# EAGLE board 10DOFATMEGAALTBOARD (EAGLE 7.5.0)
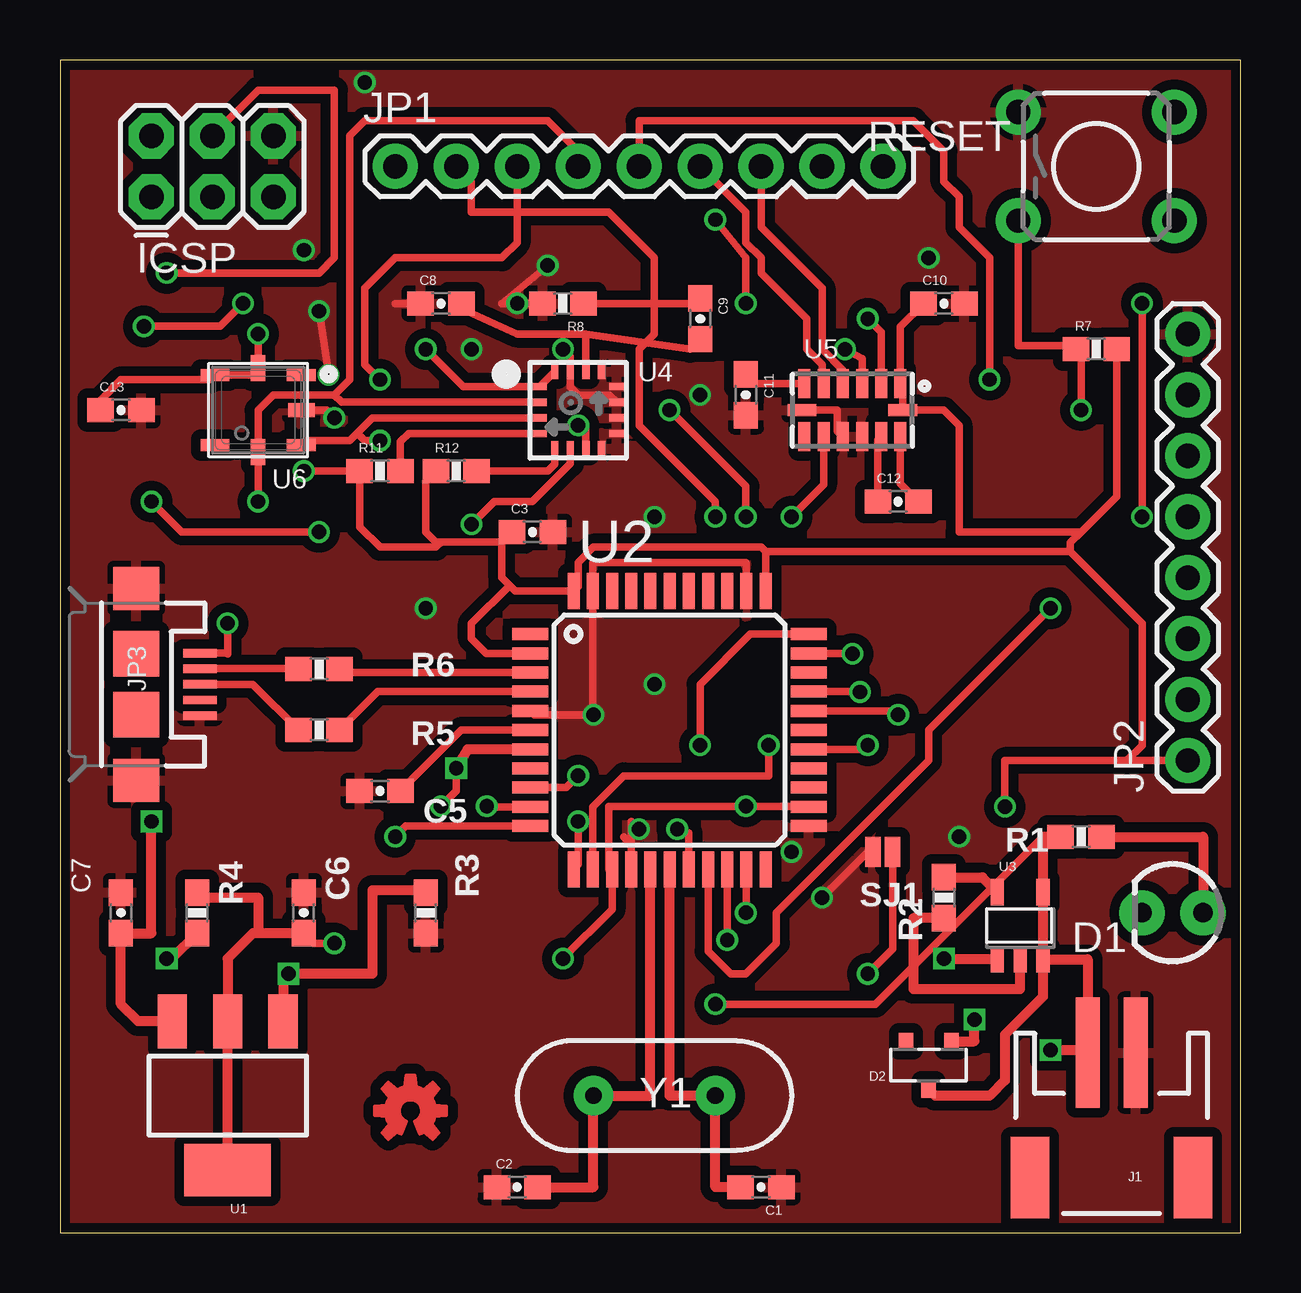
[diagram p0: board, top side]
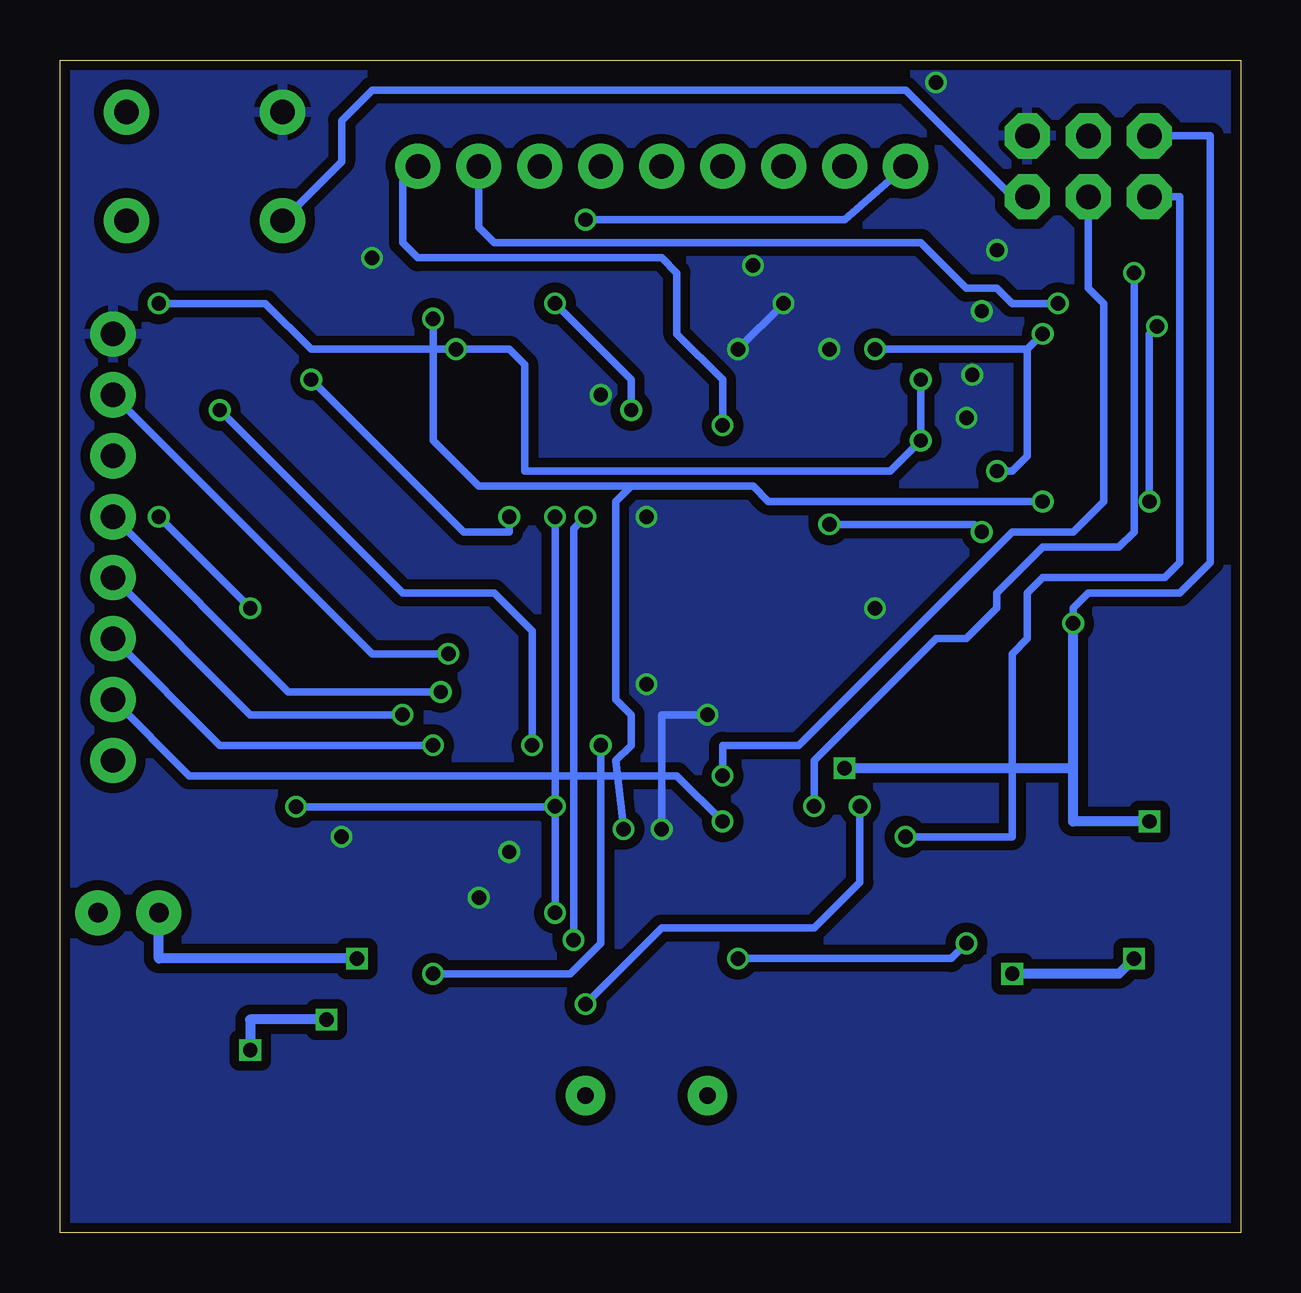
[diagram p1: board, bottom side, seen from below]

Size 49.2 x 48.88 mm. Coordinates in mm from the lower left corner, seen from the top.
Outline: 0,0 49.2,0 49.2,48.88 0,48.88 0,0
Copper layers (1*16): Top 0.035mm / dielectric 1.5mm / Bottom 0.035mm
Design rules "SeeedStudio_2layer_DRU_no_angle_20140221 *": minimum track width 6mil, minimum drill 12mil, track to track 6mil, track to pad 6mil, pad to pad 6mil, via to via 6mil, smd to smd 0mil, copper to edge 10mil, drill to drill 10mil, minimum pad ring 10mil, minimum via ring 6mil, stop-mask expansion 2mil, vias tented up to drill 100mil, thermal gap 10mil

## Footprints (pad centres in the part's own frame; a part is rotated, then mirrored left to right if it is on the bottom)
0603-CAP = smd 1.1 x 1: 1 -0.85,0; 2 0.85,0
LED3MM = drill 0.813 pad 1.88: A -1.27,0; K 1.27,0
SOT23-R = smd 0.6 x 0.7: 1 -0.95,-1; 2 0.95,-1; 3 0,1
2X3 = drill 1.016 pad 1.88 octagon: 1 0,0; 2 0,2.54; 3 2.54,0; 4 2.54,2.54; 5 5.08,0; 6 5.08,2.54
JST-2-SMD = smd 1 x 4.6: 1 -1,-3.7; 2 1,-3.7 | smd 1.6 x 3.4: NC1 -3.4,1.5; NC2 3.4,1.5
1X09 = drill 1.016 pad 1.88: 1 0,0; 2 2.54,0; 3 5.08,0; 4 7.62,0; 5 10.16,0; 6 12.7,0; 7 15.24,0; 8 17.78,0; 9 20.32,0
1X08_ROUND = drill 1.016 pad 1.88: 1 0,0; 2 2.54,0; 3 5.08,0; 4 7.62,0; 5 10.16,0; 6 12.7,0; 7 15.24,0; 8 17.78,0
USB-MICROB = smd 0.35 x 1.4: D+ 0,2.65; D- -0.65,2.65; GND 1.3,2.65; ID 0.65,2.65; VBUS -1.3,2.65 | smd 1.8 x 1.9: MT1 -4,0; MT2 4,0 | smd 1.9 x 1.9: P$1 -1.27,0; P$2 1.27,0
0603-RES = smd 1.1 x 1: 1 -0.85,0; 2 0.85,0
TACTILE-PTH = drill 1.016 pad 1.88: 1 -3.251,2.261; 2 3.251,2.261; 3 -3.251,-2.261; 4 3.251,-2.261
PAD-JUMPER-2-NC_BY_PASTE_NO_SILK = smd 0.635 x 1.27: 1 -0.401,0; 2 0.413,0
SOT223 = smd 1.219 x 2.235: 1 -2.311,-3.099; 2 0,-3.099; 3 2.311,-3.099 | smd 3.6 x 2.2: 4 0,3.099
TQFP44 = smd 1.5 x 0.5: 1 -5.8,4; 2 -5.8,3.2; 3 -5.8,2.4; 4 -5.8,1.6; 5 -5.8,0.8; 6 -5.8,0; 7 -5.8,-0.8; 8 -5.8,-1.6; 9 -5.8,-2.4; 10 -5.8,-3.2; 11 -5.8,-4; 23 5.8,-4; 24 5.8,-3.2; 25 5.8,-2.4; 26 5.8,-1.6; 27 5.8,-0.8; 28 5.8,0; 29 5.8,0.8; 30 5.8,1.6; 31 5.8,2.4; 32 5.8,3.2; 33 5.8,4 | smd 0.5 x 1.5: 12 -4,-5.8; 13 -3.2,-5.8; 14 -2.4,-5.8; 15 -1.6,-5.8; 16 -0.8,-5.8; 17 0,-5.8; 18 0.8,-5.8; 19 1.6,-5.8; 20 2.4,-5.8; 21 3.2,-5.8; 22 4,-5.8; 34 4,5.8; 35 3.2,5.8; 36 2.4,5.8; 37 1.6,5.8; 38 0.8,5.8; 39 0,5.8; 40 -0.8,5.8; 41 -1.6,5.8; 42 -2.4,5.8; 43 -3.2,5.8; 44 -4,5.8
SOT23-5 = smd 0.55 x 1.1: 1 -0.95,-1.3; 2 0,-1.3; 3 0.95,-1.3; 4 0.95,1.5; 5 -0.95,1.5
L3G4200D_LGA16L = smd 0.6 x 0.3: P$1 -1.6,0.975; P$2 -1.6,0.325; P$3 -1.6,-0.325; P$4 -1.6,-0.975; P$9 1.6,-0.975; P$10 1.6,-0.325; P$11 1.6,0.325; P$12 1.6,0.975 | smd 0.3 x 0.6: P$5 -0.975,-1.6; P$6 -0.325,-1.6; P$7 0.325,-1.6; P$8 0.975,-1.6; P$13 0.975,1.6; P$14 0.325,1.6; P$15 -0.325,1.6; P$16 -0.975,1.6
LGA14 = smd 0.5 x 1.2: 1 2,1.1; 2 1.2,1.1; 3 0.4,1.1; 4 -0.4,1.1; 5 -1.2,1.1; 6 -2,1.1; 8 -2,-1.1; 9 -1.2,-1.1; 10 -0.4,-1.1; 11 0.4,-1.1; 12 1.2,-1.1; 13 2,-1.1 | smd 1.2 x 0.5: 7 -2.1,0; 14 2.1,0
BMP180_EXTENDED = smd 1.2 x 0.5: P$1 -1.8,-1.45; P$3 1.8,-1.45; P$4 1.8,1.45; P$6 -1.8,1.45 | smd 0.6 x 1.1: P$2 0,-1.75; P$5 0,1.75 | smd 1.1 x 0.6: P$7 -1.8,0
HC49US = drill 0.7 pad 1.651: 1 -2.54,0; 2 2.54,0

## Placement (x,y rotation side)
C1  [0603-CAP]  29.21,1.91 180 top
C2  [0603-CAP]  19.05,1.91 0 top
C3  0.1uF  [0603-CAP]  19.68,29.21 0 top
C5  [0603-CAP]  13.34,18.41 180 top
C6  22u  [0603-CAP]  10.16,13.34 90 top
C7  10p  [0603-CAP]  2.54,13.34 90 top
C8  10nF  [0603-CAP]  15.88,38.73 0 top
C9  470nF  [0603-CAP]  26.67,38.1 270 top
C10  10uF  [0603-CAP]  36.83,38.73 0 top
C11  4.7uF  [0603-CAP]  28.57,34.92 270 top
C12  .22uF  [0603-CAP]  34.92,30.48 0 top
C13  0.1uF  [0603-CAP]  2.54,34.29 0 top
D1  [LED3MM]  46.35,13.34 180 top
D2  [SOT23-R]  36.2,6.99 180 top
ICSP  AVR_SPI_PRG_6PTH  [2X3]  3.81,43.18 0 top
J1  [JST-2-SMD]  43.81,3.81 180 top
JP1  [1X09]  13.97,44.45 0 top
JP2  [1X08_ROUND]  46.99,19.68 90 top
JP3  USB-MICROB  [USB-MICROB]  3.17,22.86 270 top
LOGO1  OSHW-LOGOS-COPPER  [OSHW-LOGO-S_COPPER]  14.61,5.08 0 top
R1  [0603-RES]  42.55,16.51 0 top
R2  [0603-RES]  36.83,13.97 270 top
R3  330  [0603-RES]  15.24,13.34 90 top
R4  220  [0603-RES]  5.71,13.34 90 top
R5  22  [0603-RES]  10.79,20.95 0 top
R6  22  [0603-RES]  10.79,23.5 0 top
R7  10K  [0603-RES]  43.18,36.83 0 top
R8  10K  [0603-RES]  20.95,38.73 180 top
R11  10K  [0603-RES]  13.34,31.75 0 top
R12  10K  [0603-RES]  16.51,31.75 0 top
RESET  SWITCH-MOMENTARY-2PTH  [TACTILE-PTH]  43.18,44.45 0 top
SJ1  JUMPER-PAD-2-NC_BY_PASTENO-SILK  [PAD-JUMPER-2-NC_BY_PASTE_NO_SILK]  34.29,15.88 180 top
U1  [SOT223]  6.99,5.71 180 top
U2  ATMEGA32U4-AU  [TQFP44]  25.4,20.95 0 top
U3  MCP73831  [SOT23-5]  40.01,12.7 0 top
U4  [L3G4200D_LGA16L]  21.59,34.29 0 top
U5  [LGA14]  33.02,34.29 0 top
U6  [BMP180_EXTENDED]  8.26,34.29 180 top
Y1  [HC49US]  24.77,5.71 0 top

## Library data of the parts
C1-C3 C5-C13 = SparkFun-Capacitors
D1 = SparkFun-LED
D2 U2 = adafruit
ICSP JP1 JP2 = SparkFun-Connectors
J1 = SparkFun-Connectors; BTM_NEG: -; BTM_POS: +; PROD_ID: CONN-11443; TOP_NEG: -; TOP_POS: +
JP3 = SparkFun-Connectors; PROD_ID: CONN-09505
LOGO1 = SparkFun-Aesthetics
R1-R6 = SparkFun-Resistors
R7 R8 R11 R12 = SparkFun-Resistors; PROD_ID: RES-00824
RESET = SparkFun-Electromechanical; PROD_ID: SWCH-08441
SJ1 = SparkFun-Passives
U1 = SparkFun-PowerIC; PROD_ID: VREG-08170
U3 = GeekAmmo
U4 = microbuilderLib
U5 U6 = Adafuit_10DOF
Y1 = SparkFun-FreqCtrl

## Nets
3.3V: C3.1 C6.1 C10.1 C13.1 JP2.1 R4.2 R7.2 R11.1 R12.1 U1.2 U1.4 U2.2 U2.14 U2.24 U2.34 U2.44 U4.P$1 U4.P$16 U5.1 U5.14 U6.P$2 U6.P$3
A0: U2.36
A1: U2.37
A2: U2.38
A3: U2.39
A4: U2.40
A5: U2.41
AREF: U2.42
D4: U2.25
D5: U2.31
D5\: JP2.6
D6: JP2.3 U2.27
D7: U2.1
D8: U2.28
D9: JP2.4 U2.29
D10: JP2.5 U2.30
D11: JP2.2 U2.12
D12: U2.26
D13: JP2.7 U2.32
GND: C1.1 C2.1 C3.2 C5.2 C6.2 C7.2 C8.1 C10.2 C11.2 C13.2 ICSP.6 J1.1 JP2.8 JP3.GND JP3.MT1 JP3.MT2 R3.1 R8.2 RESET.1 SJ1.2 U2.5 U2.15 U2.23 U2.35 U2.43 U4.P$8 U4.P$9 U4.P$10 U4.P$11 U4.P$12 U4.P$13 U4.P$15 U5.7 U5.10 U5.11 U6.P$7
GYROINT: JP1.9 U4.P$7
GYRORDY: JP1.8 U4.P$6
JUMP: SJ1.1 U2.33
LSMDRDY: JP1.5 U5.9
LSMINT1: JP1.6 U5.5
LSMINT2: JP1.7 U5.4
MISO: ICSP.1 U2.11
MOSI: ICSP.4 U2.10
N$1: C2.2 U2.16 Y1.1
N$2: C1.2 U2.17 Y1.2
N$3: R5.2 U2.4
N$4: R6.2 U2.3
N$6: R2.1 U3.5
N$7: R2.2 U3.2
N$8: D1.K U3.1
N$9: D1.A R1.2
N$10: JP3.D+ R5.1
N$11: R3.2 R4.1 U1.1
N$12: JP3.D- R6.1
N$21: R11.2 U4.P$4
N$22: D2.1 J1.2 U3.3
N$23: R12.2 U4.P$5
N$24: C8.2 C9.2 U4.P$14
N$26: C9.1 R8.1
N$28: C11.1 U5.6
N$31: C12.2 U5.13
N$32: C12.1 U5.12
N$69: C5.1 U2.6
RESET: ICSP.5 R7.1 RESET.3 U2.13
RX: JP1.2 U2.20
RXLED: U2.8
SCK: ICSP.3 U2.9
SCL: JP1.4 U2.18 U4.P$2 U5.2 U6.P$5
SDA: JP1.3 U2.19 U4.P$3 U5.3 U6.P$6
TX: JP1.1 U2.21
TXLED: U2.22
VBUS: C7.1 D2.3 ICSP.2 JP3.VBUS R1.1 U1.3 U2.7 U3.4

## Tracks (layer width: path | path; a pad name or v marks a point on that pad's centre or on a via)
3.3V  (via drill 0.6)
  Top 0.305: C6.1 10.58,12.06 v11.43,12.06 | v28.57,17.78 22.86,17.78 22.86,15.15 U2.14 23,13.47 v20.95,11.43 | v28.57,17.78 31.2,17.78 U2.24 31.18,17.78 v28.57,17.78 | C10.1 35.02,37.77 U5.1 35.12,35.29 U5.14 36.83,34.29 37.47,33.66 37.47,29.21 42.55,29.21 | C13.1 1.69,34.71 2.54,35.56 6.28,35.56 U6.P$3 7.96,35.74 U6.P$2 v8.26,37.47 | U2.34 29.4,28.39 | 29.4,28.39 29.21,28.57 22.23,28.57 21.59,27.94 21.59,26.95 U2.44 18.96,26.75 18.73,26.99 | 18.73,26.99 18.41,27.3 18.41,28.79 | 18.41,28.79 C3.1 | 18.41,28.79 15.88,28.79 | 15.88,28.79 15.66,28.79 15.24,29.21 15.24,31.33 R12.1 | 15.88,28.79 15.66,28.57 13.34,28.57 12.48,29.43 R11.1 v10.16,31.75 | R7.2 44.03,30.7 42.55,29.21 | v39.37,17.75 39.37,19.68 44.45,19.68 | JP2.1 44.45,19.68 | U2.2 17.75,24.16 17.14,24.77 17.14,25.4 18.73,26.99 | 29.4,28.39 42.1,28.39 | 42.1,28.39 45.09,25.4 45.09,20.32 44.45,19.68 | U4.P$16 U4.P$1 16.8,35.27 v15.24,36.83 | 42.55,29.21 42.1,28.77 42.1,28.39
  Top 0.406: C6.1 8.26,12.48 | 8.26,12.48 8.04,12.48 6.99,11.43 U1.2 U1.4 | R4.2 5.93,13.97 8.26,13.97 8.26,12.48
  Bottom 0.305: v11.43,12.06 12.06,11.43 v20.95,11.43 | v10.16,31.75 9.53,31.75 8.89,32.38 8.89,36.83 | 8.89,36.83 v8.26,37.47 | v39.37,17.75 28.6,17.75 v28.57,17.78 | v15.24,36.83 8.89,36.83
D6  (via drill 0.6)
  Top 0.305: v33.66,20.32 33.49,20.16 U2.27
  Bottom 0.305: JP2.3 42.55,20.32 v33.66,20.32
D9  (via drill 0.6)
  Top 0.305: v34.92,21.59 34.76,21.75 U2.29
  Bottom 0.305: JP2.4 41.27,21.59 v34.92,21.59
D10  (via drill 0.6)
  Top 0.305: v33.34,22.54 33.33,22.55 U2.30
  Bottom 0.305: JP2.5 39.69,22.54 v33.34,22.54
D11  (via drill 0.6)
  Top 0.305: U2.12 21.59,15.35 v21.59,17.14
  Bottom 0.305: v21.59,17.14 23.5,19.05 43.81,19.05 JP2.2
D13  (via drill 0.6)
  Top 0.305: U2.32 32.99,24.16 v33.02,24.13
  Bottom 0.305: v33.02,24.13 36.2,24.13 JP2.7
GND  (via drill 0.6)
  Top 0.305: U6.P$7 11.11,34.29 v11.43,33.97 | 23.5,16.51 23.8,16.2 U2.15 23.8,17.14 v24.13,16.83 | U2.5 19.77,21.59 v22.23,21.59 22.2,21.61 U2.43 22.2,27.91 22.23,27.94 28.57,27.94 28.6,27.91 U2.35 | SJ1.2 33.66,15.88 v31.75,13.97 | U4.P$11 22.88,34.92 21.59,34.92 21.27,35.25 U4.P$15 21.27,36.52 v20.95,36.83 | U5.10 32.38,33.42 32.38,34.29 U5.7 | C8.1 13.97,38.73 | v20.32,40.32 18.41,38.73 v19.05,38.73 R8.2 | v10.79,38.42 v11.19,35.76
  Bottom 0.305: v22.23,21.59 24.13,21.59 v24.13,16.83 | v20.95,36.83 v19.05,38.73
  other vias: 37.47,16.51 24.77,22.86 24.77,29.84 15.24,26.04 30.48,15.88 36.2,40.64 36.2,40.64 17.14,36.83 26.67,34.92 10.16,40.96 12.7,47.94
  pour Top (isolate 0.406): 0,48.9 49.53,48.9 49.53,-0.64 0,-0.64
  pour Bottom (isolate 0.406): 0,48.9 49.53,48.9 49.53,-0.64 0,-0.64
GYROINT  (via drill 0.6)
  Top 0.305: U4.P$7 21.91,33.66 v21.59,33.66
  Bottom 0.305: v21.59,33.66 21.59,35.56 23.5,37.47 23.5,40.01 24.13,40.64 34.29,40.64 34.92,41.27 34.92,43.81 JP1.9
GYRORDY  (via drill 0.6)
  Top 0.305: U4.P$6 21.27,32.06 19.68,30.48 18.1,30.48 v17.14,29.53 | v10.79,29.21 5.08,29.21 v3.81,30.48 | v3.49,37.78 6.67,37.78 v7.62,38.73
  Bottom 0.305: v17.14,29.53 11.11,29.53 v10.79,29.21 | v3.81,30.48 3.81,37.47 v3.49,37.78 | v7.62,38.73 9.53,38.73 10.16,39.37 11.43,39.37 13.34,41.27 31.11,41.27 31.75,41.91 JP1.8
JUMP  (via drill 0.6)
  Top 0.305: U2.33 28.77,24.95 26.67,22.86 v26.67,20.32 | v33.66,10.79 34.69,11.83 SJ1.1
  Bottom 0.305: v26.67,20.32 26.67,12.06 27.94,10.79 v33.66,10.79
LSMDRDY  (via drill 0.6)
  Top 0.305: U5.9 31.82,31.18 v30.48,29.84 | v38.73,35.56 38.73,40.64 37.47,41.91 37.47,43.18 36.83,43.81 36.83,45.09 35.56,46.35 24.13,46.35 JP1.5
  Bottom 0.305: v30.48,29.84 30.48,29.21 32.38,29.21 v38.73,35.56
LSMINT1
  Top 0.305: U5.5 31.75,35.46 31.75,36.2 31.11,36.83 31.11,38.1 29.21,40.01 29.21,40.64 28.57,41.27 28.57,42.55 JP1.6
LSMINT2
  Top 0.305: JP1.7 29.21,41.91 31.75,39.37 31.75,36.83 32.62,35.96 U5.4
MISO  (via drill 0.6)
  Top 0.305: v13.97,16.51 14.41,16.95 U2.11
  Bottom 0.305: ICSP.1 2.54,43.18 2.54,27.94 3.17,27.3 8.26,27.3 8.89,26.67 8.89,24.77 9.53,24.13 9.53,16.51 v13.97,16.51
MOSI  (via drill 0.6)
  Top 0.305: U2.10 17.8,17.75 v17.78,17.78 | v4.45,40.01 10.79,40.01 11.43,40.64 11.43,47.62 8.26,47.62 ICSP.4
  Bottom 0.305: v17.78,17.78 17.78,19.68 12.7,24.77 11.43,24.77 10.16,26.04 10.16,26.67 8.26,28.57 5.08,28.57 4.45,29.21 v4.45,40.01
N$1
  Top 0.406: C2.2 22.23,1.91 Y1.1 24.6,5.71 U2.16
N$2
  Top 0.406: C1.2 27.3,1.91 Y1.2 25.4,5.71 U2.17
N$3
  Top 0.305: R5.2 13.24,22.55 U2.4
N$4
  Top 0.305: R6.2 11.79,23.36 U2.3
N$6
  Top 0.406: R2.1 38.44,14.82 U3.5
N$7
  Top 0.406: R2.2 35.56,13.12 35.56,10.16 40.01,10.16 U3.2
N$8  (via drill 0.6)
  Top 0.406: U3.1 36.83,11.4 v36.83,11.43
  Bottom 0.406: v36.83,11.43 45.09,11.43 D1.K
N$9
  Top 0.406: R1.2 47.62,16.51 D1.A
N$10
  Top 0.305: R5.1 8.04,22.86 JP3.D+
N$11  (via drill 0.6)
  Top 0.406: R4.1 4.66,11.43 v4.45,11.43 | U1.1 9.3,10.57 v9.53,10.79 13.02,10.79 13.02,14.29 15.24,14.29 R3.2
  Bottom 0.406: v4.45,11.43 5.08,10.79 v9.53,10.79
N$12
  Top 0.305: R6.1 9.93,23.51 JP3.D-
N$21
  Top 0.305: U4.P$4 14.53,33.31 14.19,32.98 R11.2
N$22  (via drill 0.6)
  Top 0.406: U3.3 42.81,11.4 J1.2 42.81,7.62 v41.27,7.62 | D2.1 38.1,7.99 v38.1,8.89
  Bottom 0.406: v38.1,8.89 41.27,8.89 v41.27,7.62
N$23
  Top 0.305: R12.2 20.32,31.75 20.61,32.05 U4.P$5
N$24
  Top 0.305: C8.2 16.73,38.52 19.05,37.47 21.91,37.47 | 21.91,37.47 U4.P$14 | C9.2 26.25,36.83 21.91,37.47
N$26
  Top 0.305: R8.1 26.45,38.73 C9.1
N$28
  Top 0.305: C11.1 28.96,35.39 U5.6
N$31
  Top 0.305: C12.2 35.02,31.23 U5.13
N$32
  Top 0.305: U5.12 34.08,33.05 C12.1
N$69
  Top 0.305: C5.1 16.73,20.95 U2.6
RESET  (via drill 0.6)
  Top 0.305: RESET.3 39.93,36.97 42.19,36.97 R7.1 42.55,36.62 v42.55,34.29 | U2.13 22.2,17.75 23.5,19.05 29.53,19.05 v29.53,20.32
  Bottom 0.305: v29.53,20.32 29.53,25.08 31.11,26.67 34.92,26.67 v42.55,34.29 | ICSP.5 9.53,43.18 13.97,47.62 36.2,47.62 37.47,46.35 37.47,44.65 RESET.3
RX  (via drill 0.6)
  Top 0.305: U2.20 v27.8,12.21 | v27.3,29.84 27.3,30.48 24.13,33.66 24.13,36.83 24.77,37.47 24.77,40.64 22.86,42.55 17.14,42.55 17.14,43.81 JP1.2
  Bottom 0.305: v27.8,12.21 27.8,29.35 v27.3,29.84
SCK  (via drill 0.6)
  Top 0.305: U2.9 21.09,18.55 v21.59,19.05
  Bottom 0.305: v21.59,19.05 21.59,20.32 18.41,20.32 9.53,29.21 6.99,29.21 5.71,30.48 5.71,38.73 6.35,39.37 ICSP.3
SCL  (via drill 0.6)
  Top 0.305: U4.P$2 11.74,34.62 11.43,34.92 | 11.43,34.92 8.89,34.92 8.26,34.29 U6.P$5 v8.26,30.48 | U5.2 34.22,37.53 v33.66,38.1 | U2.18 26.2,16.66 v25.72,16.83 | JP1.4 21.59,45.09 20.32,46.35 12.7,46.35 12.06,45.72 12.06,35.56 11.43,34.92
  Bottom 0.305: v33.66,38.1 33.66,33.02 31.75,31.11 25.4,31.11 | 25.4,31.11 20.32,31.11 19.68,30.48 v8.26,30.48 | v25.72,16.83 26.04,19.68 25.4,20.32 25.4,21.59 26.04,22.23 26.04,30.48 25.4,31.11
SDA  (via drill 0.6)
  Top 0.305: U4.P$3 13.01,33.97 12.38,33.34 | 12.38,33.34 12.06,33.02 10.23,33.02 U6.P$6 | U5.3 33.42,36.43 v32.7,36.83 | v13.34,33.02 12.7,33.02 12.38,33.34 | U2.19 27,11.73 27.94,10.79 28.57,10.79 29.84,12.06 29.84,13.34 36.2,19.68 36.2,20.95 v41.27,26.04 | v45.09,29.84 v45.09,38.73 | JP1.3 19.05,41.27 18.41,40.64 13.97,40.64 12.7,39.37 12.7,36.2 v13.34,35.56
  Bottom 0.305: v41.27,26.04 v45.09,29.84 | v45.09,38.73 40.64,38.73 38.73,36.83 v32.7,36.83 30.48,36.83 29.84,36.2 29.84,31.75 14.61,31.75 v13.34,33.02 v13.34,35.56
TX  (via drill 0.6)
  Top 0.305: U2.21 28.6,13.36 v28.57,13.34 | v28.57,29.84 28.57,31.11 v25.4,34.29 | v28.57,38.73 28.57,40.64 v27.3,42.23
  Bottom 0.305: v28.57,13.34 v28.57,29.84 | v25.4,34.29 25.4,35.56 v28.57,38.73 | v27.3,42.23 16.51,42.23 JP1.1
VBUS  (via drill 0.6)
  Top 0.305: v6.99,25.4 6.99,24.13 6.96,24.16 JP3.VBUS | 40.95,16.51 33.97,9.53 v27.3,9.53 | v15.88,17.78 16.51,18.41 v16.51,19.37
  Top 0.406: R1.1 40.95,16.51 U3.4 40.95,9.84 39.37,8.26 39.37,6.35 38.73,5.71 36.47,5.71 D2.3 | U1.3 3.25,8.81 2.54,9.53 C7.1 3.81,12.48 v3.81,17.14 | U2.7 16.98,20.16 v16.51,19.37
  Bottom 0.305: ICSP.2 1.27,45.72 1.27,27.94 2.54,26.67 6.35,26.67 6.99,26.04 v6.99,25.4 | v27.3,9.53 24.13,12.7 17.78,12.7 15.88,14.61 v15.88,17.78
  Bottom 0.406: v3.81,17.14 6.99,17.14 6.99,19.37 | 6.99,19.37 v6.99,25.4 | v16.51,19.37 6.99,19.37